# Altium PCB Mikrolysreklamen.PcbDoc
Units mm, origin at the board's own origin, x right, y up, seen from the top; angles counter-clockwise.
Board outline 108.61 x 31.33 mm, 2 copper layers (Top Layer, Bottom Layer); 25 components, 182 nets, 128 pads, 9 vias.
Unrouted connection lines stored in the file: 55.
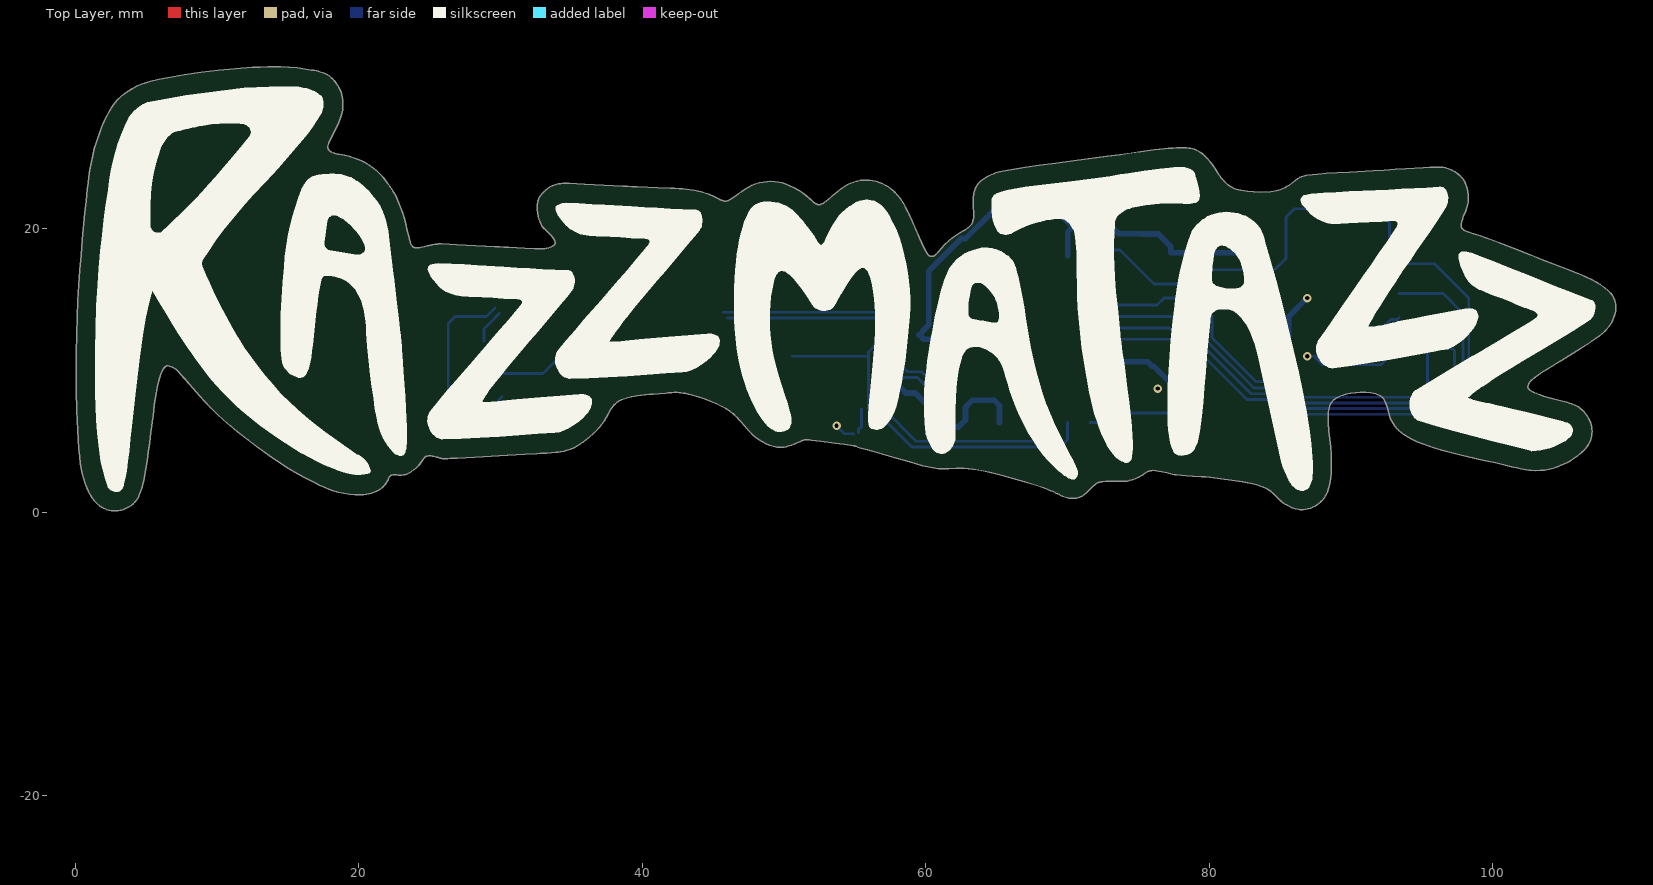
[diagram p0: Top Layer view]
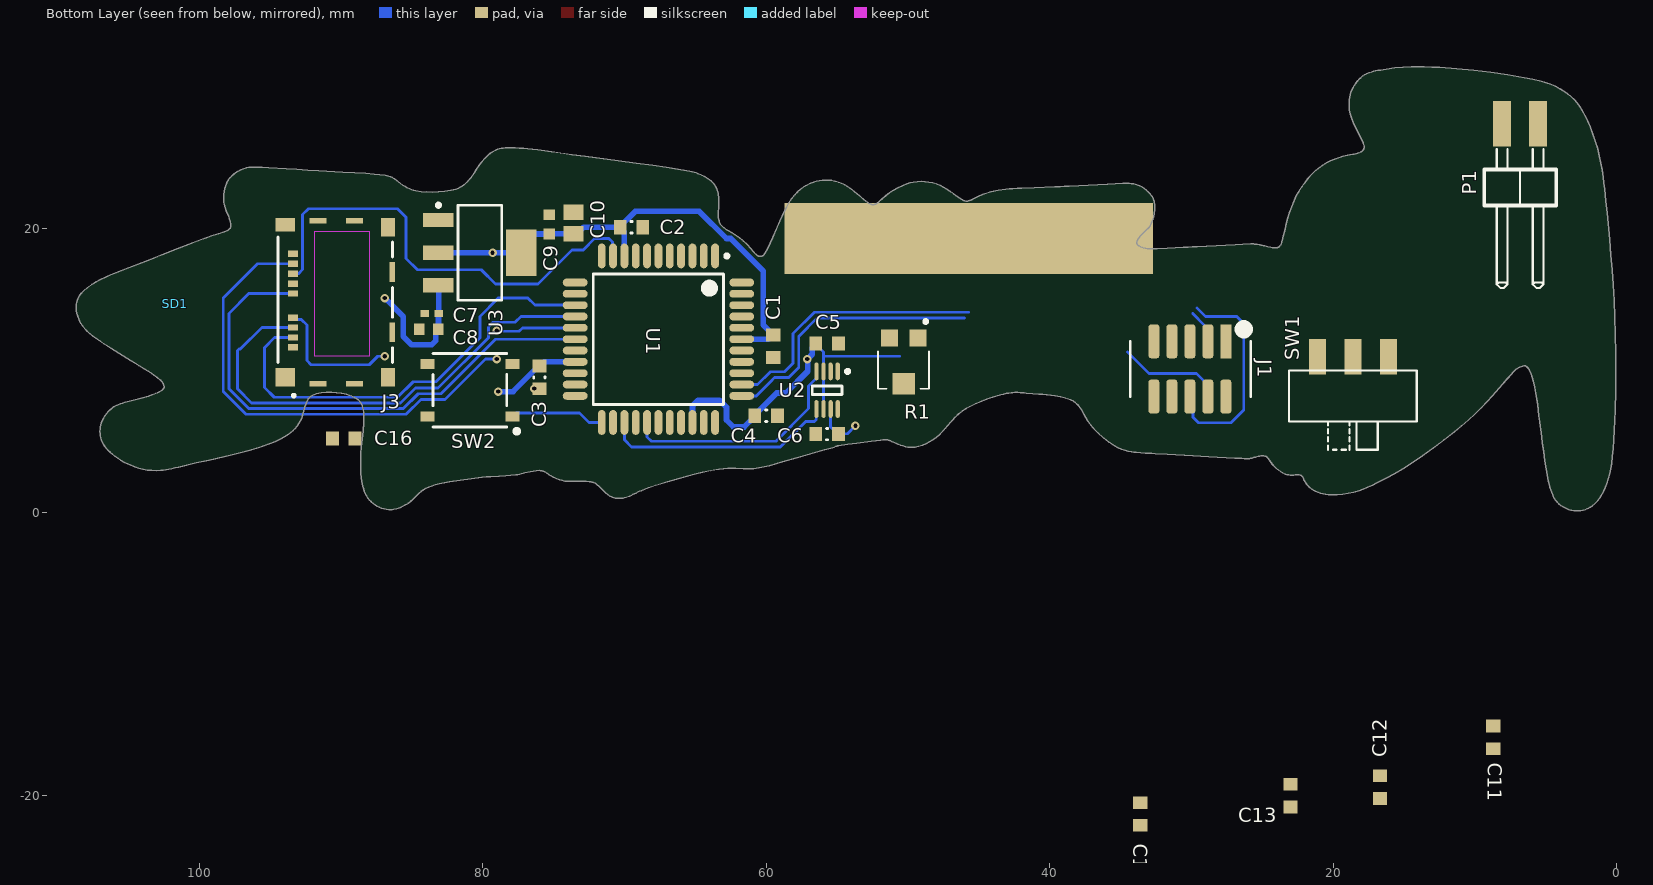
[diagram p1: Bottom Layer view, seen from below]

## Layer stack, top to bottom
Top Solder: solder mask 0.0102, Solder Resist, Dk 3.5
Top Layer: signal copper 0.0356
Dielectric 1: dielectric 0.32, FR-4, Dk 4.8
Bottom Layer: signal copper 0.0356
Bottom Solder: solder mask 0.0102, Solder Resist, Dk 3.5

## Board outline
464 vertices, not listed, extent 0.059,0.087 108.672,31.419

## Design rules (kind name [scope] priority, off if disabled: settings)
Clearance [All] p1: gap=0.2 ignorepadtopadclearanceinfootprint=FALSE except(0: Arc-Hole Track-Hole SMDPad-Hole THPad-Hole Via-Hole Fill-Hole Poly-Hole Region-Hole Text-Hole)
PolygonConnect [All] p1: connectstyle=Relief reliefconductorwidth=0.254 reliefentries=4 polygonreliefangle="90 Angle" airgapwidth=0.254
RoutingVias [All] p1: holewidth=0.3 width=0.6 viastyle="Through Hole" minholewidth=0.3 minwidth=0.6 maxholewidth=0.6 maxwidth=1.2
SolderMaskExpansion SolderMaskExpansion_via [IsVia] p1: expansion=0.102 istentingtop=TRUE
SolderMaskExpansion [All] p2: expansion=0.102 istentingtop=FALSE
Width [All] p1: maxlimit=4 minlimit=0.15 preferedwidth=0.2
30 further rules are at their usual default settings.

## Classes and differential pairs
component class Mikrolysreklamen: C1 C2 C3 C4 C5 C6 C7 C8 C9 C10 J1 J3 M1 M2 M3 P1 R1 SD1 SW1 SW2 U1 U2 U3

## Components (designator, comment, footprint, x,y, rotation, side; value= is the part's Value field where it differs from the comment)
C1 "100nF" CAPC0603(1608)55_N 59.5,11.7 r90 bottom
C2 "100nF" CAPC0603(1608)55_N 69.5,20.1 r0 bottom
C3 "100nF" CAPC0603(1608)55_N 76,9.5 r90 bottom
C4 "100nF" CAPC0603(1608)55_N 60,6.8 r0 bottom
C5 "100nF" CAPC0603(1608)55_N 55.7,11.9 r0 bottom
C6 "100nF" CAPC0603(1608)55_N 55.7,5.5 r180 bottom
C7 "100nF" CAPC1005X04L 83.6,14 r180 bottom
C8 "10µF" CAPC1608X06L 83.8,12.9 r180 bottom
C9 "10µF" CAPC1608X06L 75.3,20.3 r270 bottom
C10 "100µF" CAPC2012X11L 73.6,20.4 r270 bottom
C11 "100nF" CAPC0603(1608)55_N 8.7,-15.9 r90 bottom
C12 "100nF" CAPC0603(1608)55_N 16.7,-19.4 r270 bottom
C13 "100nF" CAPC0603(1608)55_N 23,-20 r90 bottom
C14 "100nF" CAPC0603(1608)55_N 33.6,-21.3 r270 bottom
C16 "100nF" CAPC0603(1608)55_N 89.8,5.2 r0 bottom
J1 "Header SMD 127 2x5" SMDHDRV10P127_2X5_615X330X560B 30.1,10.1 r270 bottom
J3 "MEM2085-00-115-00-A_REV0.2" GCT_MEM2085-00-115-00-A_REV0.2 90.4,14.8 r270 bottom
P1 "Pin List 1x2, Angled" LIST_ANG_1x2-SMD-2.54MM 6.8,27.4 r180 bottom
R1 "TC33X-2-103E" TRIM_TC33X-2-103E 50.3,10.5 r270 bottom
SD1 "Micro SD kort" microsdcard 101.7,14.7 r270 bottom
SW1 "Switch" JS102011SAQN 18.6,8.2 r180 bottom
SW2 "PTS526 spst-no Pushbutton" PTS526_SK15_SMTR2_LFS 80.9,8.6 r0 bottom
U1 "AVR ATXMEGA64A4U-AU" TQFP80P1200X1200X120-44N 67.6,12.2 r270 bottom
U2 "TXS0102DCUR" TSSOP50P310X90-8N 55.7,8.6 r270 bottom
U3 "TLV1117" SOT230P700X180-4N 80.2,18.3 r180 bottom

## Footprints (in the part's own frame and the unit in brackets; to place one, negate y for a bottom-side part, rotate by r counter-clockwise, add the part's x,y. Pads: shape width x height; smd on the part's side, far side on the other; paste and mask are expansions set on the pad)
CAPC0603(1608)55_N [mm] "Chip Capacitor, Body 1.6x0.8mm, Height 0.55mm, IPC Medium Density"
  rect 0.9x1 smd: 1(-0.8,0) 2(0.8,0)
  body extent -0.87,-0.48 0.88,0.47, height 0.55
CAPC1005X04L [mm] "Chip Capacitor, 2-Leads, Body 1.0x0.5mm, IPC High Density"
  rect 0.6x0.5 smd: 1(-0.5,0) 2(0.5,0)
  body extent -0.51,-0.25 0.51,0.25, height 0.5
CAPC1608X06L [mm] "Chip Capacitor, 2-Leads, Body 1.6x0.8mm, IPC High Density"
  rect 0.75x0.8 smd: 1(-0.675,0) 2(0.675,0)
  body extent -0.8,-0.43 0.8,0.43, height 0.8
CAPC2012X11L [mm] "Chip Capacitor, 2-Leads, Body 2.0x1.3mm, IPC High Density"
  rect 1.1x1.4 smd: 1(-0.75,0) 2(0.75,0)
  body extent -1,-0.62 1,0.63, height 0.77
GCT_MEM2085-00-115-00-A_REV0.2 [mm]
  rect 0.45x0.7 smd: CD(-2.02,-2.99) P1(3.18,-2.99) P2(2.48,-2.99) P3(1.78,-2.99) P4(1.08,-2.99) P5(-0.62,-2.99) P6(-1.32,-2.99) P7(-2.72,-2.99) P8(-3.42,-2.99)
  rect 0.95x1.4 smd: G1(-5.475,-3.53)
  rect 1.3x1.4 smd: G2(5.3,-3.53)
  rect 0.4x1.2 smd: G3(5.75,-1.23) G4(5.75,1.37) G9(-5.75,1.37) G10(-5.75,-1.23)
  rect 1.3x1 smd: G5(5.3,3.73) G8(-5.3,3.73)
  rect 1.4x0.4 smd: G6(2.11,4.03) G7(-2.14,4.03)
  Top Layer keep-out region: 3.8,-1.44 -5,-1.44 -5,2.41 3.8,2.41
  silkscreen extent -4.6,-4.03 6.68,4.03, body extent -5.82,-4.06 5.82,4.1, height 1.14
JS102011SAQN [mm] "Slide Switches - SPDT, SMD, ON-ON"
  rect 1.2x2.5 smd: 1(-2.5,2.75) 2(0,2.75) 3(2.5,2.75)
  silkscreen extent -4.5,-3.8 4.5,1.8, body extent -4.52,-3.8 4.52,3.75, height 3.5
LIST_ANG_1x2-SMD-2.54MM [mm] "Pin List, 2.54mm, Surface Mount, Angled"
  rect 1.27x3.18 smd: 1(-1.27,0) 2(1.27,0)
  silkscreen extent -2.54,-11.58 2.54,-1.8, body extent -2.56,-11.61 2.52,1.35, height 3.03
microsdcard [mm]
  body extent -5.51,0 5.51,15, height 1
PTS526_SK15_SMTR2_LFS [mm]
  rect 1x0.7 smd: 1(-3,1.85) 2(3,1.85) 3(-3,-1.85) 4(3,-1.85)
  silkscreen extent -3.45,-2.6 2.6,3.05, body extent -3.2,-2.6 3.2,2.6, height 1.5
SMDHDRV10P127_2X5_615X330X560B [mm] "SMD 2X5 Vertical Header"
  rect 2.4x0.76 smd: 1(-1.95,2.54)
  rrect50% 2.4x0.76 smd: 2(1.95,2.54) 3(-1.95,1.27) 4(1.95,1.27) 5(-1.95,0) 6(1.95,0) 7(-1.95,-1.27) 8(1.95,-1.27) 9(-1.95,-2.54) 10(1.95,-2.54)
  silkscreen extent -2.94,-4.21 1.95,4.29
SOT230P700X180-4N [mm] "SOT223, 4-Leads, Body 6,50x7,00mm (avg), Pitch 2,30mm, IPC Medium Density"
  rect 2.15x1 smd: 1(-2.925,2.3) 2(-2.925,0) 3(-2.925,-2.3)
  rect 2.15x3.25 smd: 4(2.925,0)
  silkscreen extent -3.05,-3.35 1.55,3.47, body extent -3.54,-3.25 3.54,3.25, height 1.65
TQFP80P1200X1200X120-44N [mm] "TQFP, 44-Leads, Body 10,00x10,00mm, Pitch 0,80mm, IPC Medium Density"
  oval 1.75x0.55 smd: 1(-5.875,4) 2(-5.875,3.2) 3(-5.875,2.4) 4(-5.875,1.6) 5(-5.875,0.8) 6(-5.875,0) 7(-5.875,-0.8) 8(-5.875,-1.6) 9(-5.875,-2.4) 10(-5.875,-3.2) 11(-5.875,-4) 23(5.875,-4) 24(5.875,-3.2) 25(5.875,-2.4) 26(5.875,-1.6) 27(5.875,-0.8) 28(5.875,0) 29(5.875,0.8) 30(5.875,1.6) 31(5.875,2.4) 32(5.875,3.2) 33(5.875,4)
  oval 0.55x1.75 smd: 12(-4,-5.875) 13(-3.2,-5.875) 14(-2.4,-5.875) 15(-1.6,-5.875) 16(-0.8,-5.875) 17(0,-5.875) 18(0.8,-5.875) 19(1.6,-5.875) 20(2.4,-5.875) 21(3.2,-5.875) 22(4,-5.875) 34(4,5.875) 35(3.2,5.875) 36(2.4,5.875) 37(1.6,5.875) 38(0.8,5.875) 39(0,5.875) 40(-0.8,5.875) 41(-1.6,5.875) 42(-2.4,5.875) 43(-3.2,5.875) 44(-4,5.875)
  silkscreen extent -6,-4.6 4.6,4.95, body extent -6.03,-5.97 5.97,6.03, height 1.1
TRIM_TC33X-2-103E [mm]
  rect 1.2x1.2 smd: 1(-1.8,1) 3(-1.8,-1)
  rect 1.5x1.6 smd: 2(1.45,0)
  silkscreen extent -3.07,-1.8 1.8,1.8, body extent -1.91,-1.8 2.05,1.8, height 1.13
TSSOP50P310X90-8N [mm] "TSSOP, 8-Leads, Body 2,1x2,4mm (max), Pitch 0,50mm, IPC Medium Density"
  oval 1.25x0.3 smd: 1(-1.325,0.75) 2(-1.325,0.25) 3(-1.325,-0.25) 4(-1.325,-0.75) 5(1.325,-0.75) 6(1.325,-0.25) 7(1.325,0.25) 8(1.325,0.75)
  silkscreen extent -1.45,-1.05 0.3,1.57, body extent -1.55,-1.05 1.55,1.05, height 0.8

## Part data
C1 C2 C3 C4 C5 C6 C11 C12 C13 C14 C16: library part 5152, antall=985, beskrivelse="X7R 50V 5%", dybde=0, elektrisk_verdi=100nF, hylle=0, id=5152, komponenttype=2, lager_type=Baklager, leverandor=Farnell, leverandor_varenr=1759122, navn=100nF, nokkelord="Kondensator, Capacitor, CAP", pakke_opprettet="18/02/2015 14:18:13", pakke_opprettet_av=815, pakketype=0603, pris=1, produsent=Multicomp, rad=21, rom=OV, symbol_opprettet="14/11/2014 20:19:34", symbol_opprettet_av=815
C7: library part C0402-100n, "Capacitor, X7R, ±10%", Artikkelnr Noca=20039200, Artikkelnr Simpro=N.A., Footprint Doc=0402, LatestRevisionDate=2009-11-23, Note=16V, Part Number=C0402-100n, Pin Count=2, Published=2009-05-08, Publisher="Nordic Semiconductor"
C8 C9: library part C0603-10µ, "Capacitor, X5R, ±20%", Artikkelnr Noca=20039234, Artikkelnr Simpro=N.A., Footprint Doc=0603, LatestRevisionDate=2011-01-17, Note=6.3V, Part Number=C0603-10µ, Pin Count=2, Published=2011-01-17, Publisher="Nordic Semiconductor"
C10: library part C0805-TBD, "Chip Cap 0805", Artikkelnr Noca=N.A., Artikkelnr Simpro=N.A., Footprint Doc=0805, LatestRevisionDate=2013-12-17, Note="Chip Cap", Part Number=C0805-TBD, Pin Count=2, Published=2013-12-17, Publisher="Nordic Semiconductor"
J1: library part 2449, "1,27mm Pitch SMD Header", id=2449, navn="Header SMD 127 2x5", nokkelord=JTAG, pakke_opprettet="15.11.2014 18:30:38", pakke_opprettet_av=815, pakketype=101, pris=20, symbol_opprettet="15.11.2014 18:33:29", symbol_opprettet_av=815
J3: library part 6893, "MicroSD Push pull Memory Card Connector", Package=None, Availability="Not in stock", beskrivelse="MICRO SD PUSH-PULL SMT 1.15MM", Check_prices=https://www.snapeda.com/parts/MEM2085-00-115-00-A/Global+Connector+Technology/view-part/?ref=eda, id=6893, komponenttype=11, leverandor=DigiKey, leverandor_varenr=2073-MEM2085-00-115-00-ACT-ND, MF="Global Connector Technology", MP=MEM2085-00-115-00-A, navn="MEM2085 microSDcardHolder", nokkelord="sdcard, microsd", pakke_opprettet="16/04/2023 02:33:45", pakke_opprettet_av=815, pakketype=SMD, Price=None, pris=12, produsent=GCT, produsent_varenr=MEM2085-00-115-00-A, SnapEDA_Link=https://www.snapeda.com/parts/MEM2085-00-115-00-A/Global+Connector+Technology/view-part/?ref=snap, symbol_opprettet="16/04/2023 02:35:20", symbol_opprettet_av=815
P1: library part "Pin List Ang 1x2 SMD, 2.54mm", "Pin List 1x2, 2.54mm (100mil), Right Angled, SMD", Manufacturer=W-CON, Manufacturer Part Number=1125B-1102S0Z135R2, Part number IPS=N.A., Artikkelnr Noca=55010023, ComponentLink1Description=Datasheet, ComponentLink2Description="Supplier link", Footprint Doc=LIST_ANG_1x2-SMD-2.54MM, HelpURL=\\hizz\pro\app9717\Datasheet\connectores\W-CON\1125B-11XXXXZXXXXX.pdf, LatestRevisionDate=2016-05-26, Part Number="Pin List Ang 1x2 SMD, 2.54mm", Pin Count=2, Published=2016-01-22, Publisher="Nordic Semiconductor", Supplier 1=Cabcon, Supplier 2=Samtec, Supplier Part Number 1=1125B-1102S0Z135R2, Supplier Part Number 2=TSM-102-01-L-SH-A
R1: library part 6892, beskrivelse="SMD Trimpot", elektrisk_verdi=10k, id=6892, komponenttype=1, leverandor=DigiKey, leverandor_varenr=TC33X-103ECT-ND, navn=TC33X-2-103E, nokkelord="potentiometer, potmeter, trim, resistor", pakke_opprettet="16/04/2023 02:23:24", pakke_opprettet_av=815, pakketype=SMD, pris=4, produsent=Bourns, produsent_varenr=TC33X-2-103E, symbol_opprettet="03/11/2016 15:34:07", symbol_opprettet_av=815
SD1: library part 3019, antall=-1, dybde=1, hylle=3, id=3019, lager_type=Baklager, navn="Micro SD kort", nokkelord="SD, minnekort", pakke_opprettet="16/04/2023 02:41:18", pakke_opprettet_av=815, pris=70, rad=3, rom=OV, symbol_opprettet="16/04/2023 02:41:09", symbol_opprettet_av=815
SW1: library part JS102011SAQN, "SMD slide Switch (ON-ON)", Manufacturer="C&K Components", Part number IPS=N.A., Supplier Part Number 1=401-1999-1-ND, Artikkelnr Noca=50019064, ComponentLink1Description=Datasheet, ComponentLink2Description="Supplier link", Footprint Doc=JS102011SAQN, HelpURL=http://www.ck-components.com/14398/js_14july11.pdf/, LatestRevisionDate=2011-08-15, Manufacturer Part Number=JS102011SAQN, Part Number=JS102011SAQN, Pin Count=3, Published=2011-08-15, Publisher="Nordic Semiconductor", Supplier 1=Digi-Key, Supplier 2=Mouser, Supplier Part Number 2=611-JS102011SAQN
SW2: library part 6894, beskrivelse="Tactile SMD pushbutton 5.2x5.2mm 1.5mmh, 260gf, spst-no", id=6894, komponenttype=12, leverandor=DigiKey, leverandor_varenr=CKN12221-1-ND, navn="PTS526 spst-no Pushbutton", nokkelord="knapp, button, tactile, spst-no", pakke_opprettet="16/04/2023 03:26:55", pakke_opprettet_av=815, pakketype=SMD, pris=2, produsent=C&K, produsent_varenr="PTS526 SK15 SMTR2 LFS", symbol_opprettet="14/11/2014 21:57:30", symbol_opprettet_av=815
U1: library part 2103, "Mikrokontroller", antall=75, dybde=0, hylle=0, id=2103, kolonne=2, lager_type=Fremlager, navn="AVR ATXMEGA64A4U-AU", pakke_opprettet="22.08.2014 14:00:28", pakke_opprettet_av=774, pakketype=45, pris=0, produsent=Atmel, rad=4, rom=OV, symbol_opprettet="22.08.2014 14:00:55", symbol_opprettet_av=774
U2: "IC VOLT-LEVEL TRANSLATOR 8-US8", Manufacturer="Texas Instruments", Part number IPS=N.A., Supplier Part Number 1=296-21931-1-ND, Artikkelnr Noca=N.A., ComponentLink1Description=Datasheet, ComponentLink2Description="Supplier link", Footprint Doc=8-VFSOP, HelpURL=http://www.ti.com/lit/ds/symlink/txs0102.pdf, LatestRevisionDate=2012-09-06, Manufacturer Part Number=TXS0102DCUR, Note="TEXAS INSTRUMENTS - TXS0102DCUR - IC, TRANSLATOR", Part Number=TXS0102DCUR, Pin Count=8, Published=2012-09-06, Publisher="Nordic Semiconductor", Supplier 1=Digi-Key, Supplier 2=Farnell, Supplier Part Number 2=170-3315
U3: library part TLV1117-33CDCYR, "REG LDO 3.3V 0.8A SOT223", Manufacturer="Texas Instruments", Part number IPS=N.A., Supplier Part Number 1=296-21112-1-ND, Artikkelnr Noca=N.A., ComponentLink1Description=Datasheet, ComponentLink1URL=http://www.ti.com/lit/ds/symlink/tlv1117.pdf, ComponentLink2Description="Supplier link", Footprint Doc=SOT-223, LatestRevisionDate=2018-08-10, Manufacturer Part Number=TLV1117-33CDCYR, Part Number=TLV1117-33CDCYR, Pin Count=4, Published=2018-08-10, Publisher="Nordic Semiconductor", Supplier 1=Digi-Key

## Free pads (board coordinates)
  rect 26x5 smd far side: 0(45.7,19.3)

## Via types
v1: diameter 0.6, hole 0.3, Top Layer to Bottom Layer, tented both sides, 9 vias

## Nets (pads, with @x,y where several pads share a name; then routed paths per layer and width w, separated by ;. In a path a pad name is that pad's centre, name@x,y a point inside that pad or via, vN(x,y) a via of type N, cw(c..) or ccw(c..) an arc to the next point about the centre after c; other vN are vias at no path point)
BRIGTHNESS: R1.2 U1.1
CARD_DETECT: J3.CD U1.10 | length 33
  Bottom Layer w0.2: U1.10 70.844,18.119 70.844,19.044 71.1,19.3 72.1,19.3 72.9,18.5 73.7,18.5 76.1,16.1 79.1,16.1 80.1,17.1 84.6,17.1 85.4,17.9 85.4,20.8 86,21.4 92.3,21.4 92.7,21 92.7,17.105 92.985,16.82 J3.CD
CKI: U2.1
DUMMY_NET: SW1.3
GND: C1.1 C2.1 C3.1 C4.1 C5.1 C6.1 C7.1 C8.1 C9.1 C10.1 C11.1 C12.1 C13.1 C14.1 C16.1 J1.2 J1.10 J3.G1 J3.G2 J3.G3 J3.G4 J3.G5 J3.G6 J3.G7 J3.G8 J3.G9 J3.G10 J3.P6 P1.2 R1.1 SW2.3 SW2.4 U1.8 U1.18 U1.30 U1.38 U2.2 U3.1
  other v1: 76.354,8.714
MISO: J3.P7 U1.16 | length 39.7
  Bottom Layer w0.2: U1.16 77.2,13 77.44,12.76 78.96,12.76 v1(79,12.8) ; v1(79,10.8) 79.8,10.8 82.65,7.95 84.35,7.95 85.4,6.9 96.7,6.9 98.3,8.5 98.3,15.1 95.88,17.52 J3.P7
MOSI: J3.P3 U1.15 | length 34.5
  Bottom Layer w0.2: U1.15 77.3,13.8 77.7,13.4 79.249,13.4 79.6,13.049 79.6,12.3 83.15,8.75 84.75,8.75 85.8,7.7 96.3,7.7 97.3,8.7 97.3,11.383 97.183,11.5 97.1,11.5 95.58,13.02 J3.P3
NetD1_2: 
NetD1_3: 
NetD2_2: 
NetD2_3: 
NetD3_2: 
NetD3_3: 
NetD4_2: 
NetD4_3: 
NetD5_2: 
NetD5_3: 
NetD6_2: 
NetD6_3: 
NetD7_2: 
NetD7_3: 
NetD8_2: 
NetD8_3: 
NetD9_2: 
NetD9_3: 
NetD10_2: 
NetD10_3: 
NetD11_2: 
NetD11_3: 
NetD12_2: 
NetD12_3: 
NetD13_2: 
NetD13_3: 
NetD14_2: 
NetD14_3: 
NetD15_2: 
NetD15_3: 
NetD16_2: 
NetD16_3: 
NetD17_2: 
NetD17_3: 
NetD18_2: 
NetD18_3: 
NetD19_2: 
NetD19_3: 
NetD20_2: 
NetD20_3: 
NetD21_2: 
NetD21_3: 
NetD22_2: 
NetD22_3: 
NetD23_2: 
NetD23_3: 
NetD24_2: 
NetD24_3: 
NetD25_2: 
NetD25_3: 
NetD26_2: 
NetD26_3: 
NetD27_2: 
NetD27_3: 
NetD28_2: 
NetD28_3: 
NetD29_2: 
NetD29_3: 
NetD30_2: 
NetD30_3: 
NetD31_2: 
NetD31_3: 
NetD32_2: 
NetD32_3: 
NetD33_2: 
NetD33_3: 
NetD34_2: 
NetD34_3: 
NetD35_2: 
NetD35_3: 
NetD36_2: 
NetD36_3: 
NetD37_2: 
NetD37_3: 
NetD38_2: 
NetD38_3: 
NetD39_2: 
NetD39_3: 
NetD40_2: 
NetD40_3: 
NetD41_2: 
NetD41_3: 
NetD42_2: 
NetD42_3: 
NetD43_2: 
NetD43_3: 
NetD44_2: 
NetD44_3: 
NetD45_2: 
NetD45_3: 
NetD46_2: 
NetD46_3: 
NetD47_2: 
NetD47_3: 
NetD48_2: 
NetD48_3: 
NetD49_2: 
NetD49_3: 
NetD50_2: 
NetD50_3: 
NetD51_2: 
NetD51_3: 
NetD52_2: 
NetD52_3: 
NetD53_2: 
NetD53_3: 
NetD54_2: 
NetD54_3: 
NetD55_2: 
NetD55_3: 
NetD56_2: 
NetD56_3: 
NetD57_2: 
NetD57_3: 
NetD58_2: 
NetD58_3: 
NetD59_2: 
NetD59_3: 
NetD60_2: 
NetD60_3: 
NetD61_2: 
NetD61_3: 
NetD62_2: 
NetD62_3: 
NetD63_2: 
NetD63_3: 
NetD64_2: 
NetD64_3: 
NetD65_2: 
NetD65_3: 
NetD66_2: 
NetD66_3: 
NetD67_2: 
NetD67_3: 
NetD68_2: 
NetD68_3: 
NetD69_2: 
NetD69_3: 
NetD70_2: 
NetD70_3: 
NetD71_2: 
NetD71_3: 
NetD72_2: 
NetD72_3: 
NetD73_2: 
NetD73_3: 
NetD74_2: 
NetD74_3: 
NetD75_2: 
NetD75_3: 
NetD76_2: 
NetD76_3: 
NetD77_2: 
NetD77_3: 
NetD78_2: 
NetD78_3: 
NetD79_2: 
NetD79_3: 
NetD80_2: 
NetD80_3: 
NetD81_2: 
NetD81_3: 
NetD82_2: 
NetD82_3: 
NetP1_1: P1.1 SW1.2
NetU1_25: U1.25 U2.5 | length 17
  Bottom Layer w0.2: U2.5@56.45,6.827 U2.5 56.469,7.256 56.469,6.531 56.6,6.4 57.2,6.4 59,4.6 69.5,4.6 70,5.1 U1.25
NetU1_27: U1.27 U2.4 | length 16.4
  Bottom Layer w0.2: U2.4 56.45,9.45 57,8.9 57,7.3 59.3,5 68.1,5 68.4,5.3 U1.27
PDI_CLOCK: J1.6 U1.35 | length 34.9
  Bottom Layer w0.2: 29.6,14.4 29,13.8 26.8,13.8 26.3,13.3 26.3,7.2 27.2,6.3 29.483,6.3 29.876,6.693 29.876,7.926 J1.6 ; 45.7,14.1 56.6,14.1 58.1,12.6 58.1,10.5 58.7,9.9 59.7,9.9 60.6,9 U1.35
PDI_DATA: J1.3 U1.34 | length 21.7
  Bottom Layer w0.2: J1.3 28.83,12.919 29.11,13.199 29.11,13.21 29.9,14 ; 46,13.7 56.4,13.7 57.7,12.4 57.7,10.2 58.4,9.5 59.4,9.5 59.7,9.2 60.7,8.2 U1.34
SCK: J3.P5 U1.17 | length 37.4
  Bottom Layer w0.2: U1.17 79.1,12.2 82.95,8.35 84.55,8.35 85.6,7.3 96.5,7.3 97.9,8.7 97.9,14.02 96.5,15.42 J3.P5
SDI: U2.8
SS: J3.P2 U1.14 | length 31.3
  Bottom Layer w0.2: U1.14 76.318,14.6 76.818,15.1 78.9,15.1 80.2,13.8 80.2,12.3 83.3,9.2 84.9,9.2 86,8.1 94.7,8.1 95.4,8.8 95.4,11.6 94.68,12.32 J3.P2
"USER BUTTON": SW2.1 SW2.2 U1.23 | length 6.7
  Bottom Layer w0.2: U1.23 72.493,6.325 73.168,7 77.65,7 SW2.1
VCC_P3V3: C1.2 C2.2 C3.2 C4.2 C5.2 C9.2 C10.2 J1.4 J3.P4 R1.3 U1.9 U1.19 U1.31 U1.39 U2.3 U2.6 U3.2 U3.4 | length 83.5
  Bottom Layer w0.2: J1.4 28.83,8.97 29.648,9.788 32.988,9.788 34.5,11.3 ; 50.6,11 55.95,11 ; U2.6 U2.3 55.95,11 ; C5.2@56.5,11.85 55.95,11.3 55.95,11 ; v1(86.9,11) 87.4,11 88,10.4 92.1,10.4 92.4,10.7 92.4,13.2 92.795,13.595 93.265,13.595 J3.P4
  Bottom Layer w0.4: C5.2@56.5,11.85 56.75,11.6 56.75,11.134 57.084,10.8 v1(57.1,10.8) ; v1@57.062,10.762 57.062,9.938 58.6,8.4 59.25,8.4 60.8,6.85 C4.2 60.8,6.75 61.55,6 62.3,6 62.8,6.5 62.8,7.4 63.3,7.9 64.8,7.9 65.2,7.5 U1.31 ; C1.2 C1.2@59.55,12.5 ; U1.39 59.85,12.2 C1.2@59.55,12.5 ; U1.9 70,19.75 70.35,20.1 72.866,20.1 72.966,20 73.25,20 73.613,19.638 75.288,19.638 C9.2 76.4,19.625 77.275,18.75 U3.4 v1(79.3,18.3) U3.2 ; C2.2 70.3,20.15 69.225,21.225 64.725,21.225 62.8,19.3 62.5,19.3 60.2,17 60.2,13.2 59.8,12.8 59.8,12.75 C1.2@59.55,12.5 ; U1.19 75.65,10.6 75.95,10.3 C3.2 76.05,10.3 77.85,8.5 v1(78.9,8.5)
VDD: C6.2 C7.2 C8.2 C11.2 C12.2 C13.2 C14.2 C16.2 SW1.1 U2.7 U3.3 | length 13.2
  Bottom Layer w0.2: v1(53.7,6.1) 54.267,5.533 54.867,5.533 C6.2 ; C6.2@55.25,5.6 55.25,5.9 55.333,5.9 55.45,6.017 U2.7
  Bottom Layer w0.4: U3.3 83.1,15.975 C7.2 83.113,13.988 83.113,12.913 C8.2 83.3,12.725 83.3,12.1 83.6,11.8 85,11.8 85.6,12.4 85.6,13.8 v1(86.9,15.1)
pads on no net: J1.1 J1.5 J1.7 J1.8 J1.9 J3.P1 J3.P8 U1.2 U1.3 U1.4 U1.5 U1.6 U1.7 U1.11 U1.12 U1.13 U1.20 U1.21 U1.22 U1.24 U1.26 U1.28 U1.29 U1.32 U1.33 U1.36 U1.37 U1.40 U1.41 U1.42 U1.43 U1.44

## Polygon pours and split planes (outlines as drawn)
no net on Top Overlay "NONET_L-01_P-001" (solid): 94.475,6.724 ccw(c95.149,7.274) 94.623,6.581 ccw(c95.001,7.078) 94.788,6.491 ccw(c114.403,68.486) 97.316,5.747 98.652,5.388 99.989,5.042 101.292,4.711 101.869,4.565 102.153,4.493 102.434,4.421 102.711,4.35 102.733,4.345 102.755,4.345 ccw(c102.661,8.863) 104.882,4.928 ccw(c103.789,6.901) 105.383,5.305 ccw(c104.858,5.863) 105.61,5.716 ccw(c105.162,5.776) 105.444,6.128 ccw(c104.879,5.466) 105.244,6.257 ccw(c104.548,4.76) 104.94,6.363 102.304,7.029 101.475,7.23 100.644,7.43 100.287,7.518 ccw(c97.593,-3.984) 100.018,7.578 99.883,7.606 99.75,7.632 99.617,7.659 cw(c102.371,22.184) 99.014,7.786 cw(c100.344,13.36) 98.725,7.863 cw(c99.857,11.705) 98.446,7.957 cw(c99.549,10.885) 98.176,8.073 cw(c99.864,6.521) 98.487,8.354 cw(c104.107,1.243) 98.81,8.598 cw(c109.719,-6.52) 99.282,8.928 cw(c118.573,-19.596) 99.93,9.355 cw(c141.158,-54.91) 101.295,10.211 102.041,10.666 102.809,11.129 103.583,11.594 105,12.449 105.648,12.845 106.236,13.212 106.751,13.542 ccw(c106.224,14.29) 107.036,13.867 ccw(c106.009,14.459) 107.192,14.537 ccw(c106.629,14.486) 107.126,14.755 ccw(c106.753,14.548) 106.892,14.952 cw(c132.503,84.826) 105.266,15.569 104.423,15.903 103.572,16.246 102.724,16.591 100.993,17.291 100.132,17.632 99.287,17.959 98.467,18.265 ccw(c97.964,16.857) 98.166,18.339 ccw(c98.023,17.317) 97.987,18.348 ccw(c98.003,17.781) 97.821,18.318 ccw(c97.919,18.026) 97.692,18.234 ccw(c97.932,18.041) 97.623,18.047 ccw(c98.302,18.011) 97.628,17.925 ccw(c98.918,18.086) 97.653,17.784 ccw(c100.133,18.371) 97.696,17.626 ccw(c103.539,19.262) 97.903,17.014 ccw(c100.574,18.12) 98.053,16.705 ccw(c100.307,17.978) 98.533,16.093 ccw(c99.961,17.677) 99.081,15.735 ccw(c102.16,22.086) 99.488,15.553 ccw(c107.292,34.543) 100.005,15.349 100.648,15.106 cw(c93.736,-2.847) 101.341,14.824 101.686,14.678 ccw(c108.528,30.984) 102.033,14.536 ccw(c105.716,23.863) 102.384,14.405 cw(c99.613,5.983) 102.868,14.23 cw(c102.329,12.901) 103.05,14.141 cw(c102.808,13.711) 103.175,14.041 cw(c103.022,13.904) 103.226,13.925 cw(c102.907,13.938) 103.096,13.681 cw(c102.346,14.516) 102.967,13.581 cw(c101.692,15.488) 102.838,13.5 ccw(c105.976,7.993) 102.741,13.445 101.086,12.434 100.262,11.943 99.444,11.46 98.635,10.986 97.034,10.045 96.223,9.563 95.409,9.071 94.594,8.571 94.576,8.558 ccw(c95.289,7.689) 94.165,7.668 ccw(c95.691,7.651) 94.189,7.386 ccw(c95.601,7.604)
no net on Top Overlay "NONET_L-01_P-001" (solid): 87.693,11.003 ccw(c89.098,11.624) 87.83,10.757 ccw(c89.018,11.532) 88.366,10.273 ccw(c88.745,11.043) 88.56,10.204 ccw(c88.69,10.791) 88.747,10.193 ccw(c80.873,73.929) 91.355,10.569 92.719,10.8 94.078,11.041 95.4,11.281 95.987,11.387 96.276,11.439 96.561,11.49 96.841,11.541 96.863,11.545 96.881,11.554 ccw(c94.926,15.604) 98.57,12.969 ccw(c96.749,14.309) 98.868,13.52 ccw(c98.159,13.809) 98.903,13.987 ccw(c98.455,13.849) 98.574,14.303 ccw(c98.34,13.477) 98.338,14.335 ccw(c98.337,12.691) 98.018,14.304 95.344,13.811 94.507,13.649 93.669,13.484 93.307,13.414 ccw(c95.289,3.224) 92.903,13.327 92.772,13.296 92.642,13.264 cw(c89.094,27.533) 92.04,13.128 cw(c90.934,18.687) 91.746,13.077 cw(c91.176,17.011) 91.452,13.046 cw(c91.236,16.164) 91.157,13.039 cw(c93.26,12.372) 91.322,13.427 cw(c99.236,9.384) 91.514,13.783 cw(c107.593,4.644) 91.807,14.279 cw(c121.264,-3.681) 92.219,14.938 cw(c151.168,-22.79) 93.103,16.286 93.593,17.01 94.098,17.751 94.607,18.494 95.54,19.862 95.964,20.492 96.347,21.069 96.678,21.583 ccw(c95.884,22.046) 96.802,21.999 ccw(c95.614,22.108) 96.665,22.672 ccw(c96.169,22.383) 96.515,22.841 ccw(c96.263,22.506) 96.22,22.923 cw(c90.599,95.133) 94.484,22.809 93.578,22.762 92.662,22.718 91.747,22.676 89.882,22.592 88.959,22.544 88.055,22.489 87.182,22.425 ccw(c87.281,21.085) 86.712,22.302 ccw(c86.961,21.792) 86.573,22.207 ccw(c86.781,21.983) 86.49,22.077 ccw(c86.775,21.998) 86.505,21.878 ccw(c87.121,22.127) 86.561,21.769 ccw(c87.704,22.495) 86.644,21.653 ccw(c88.971,23.495) 86.75,21.526 ccw(c91.369,25.444) 87.195,21.056 ccw(c89.152,23.167) 87.46,20.838 ccw(c88.988,22.956) 88.152,20.482 ccw(c88.791,22.558) 88.798,20.385 ccw(c88.962,27.548) 89.244,20.389 ccw(c88.473,40.786) 89.8,20.418 90.487,20.464 cw(c91.584,3.599) 91.234,20.496 91.608,20.506 ccw(c91.105,37.658) 91.982,20.521 ccw(c91.496,30.021) 92.355,20.548 cw(c93.348,11.512) 92.866,20.589 cw(c92.931,19.121) 93.07,20.584 cw(c93.028,20.08) 93.224,20.546 cw(c93.145,20.356) 93.32,20.464 cw(c93.032,20.343) 93.304,20.189 cw(c92.268,20.641) 93.227,20.043 cw(c91.289,21.242) 93.143,19.916 93.078,19.825 cw(c8.769,75.499) 91.994,18.217 91.449,17.429 90.906,16.65 90.368,15.881 89.305,14.359 88.769,13.583 88.234,12.798 87.702,12.004 87.693,11.986 ccw(c88.713,11.494)
no net on Top Overlay "NONET_L-01_P-001" (solid): 77.569,4.211 ccw(c78.042,4.618) 77.66,4.124 ccw(c77.945,4.487) 77.867,4.032 ccw(c78.042,5.223) 78.599,4.156 ccw(c78.177,4.875) 78.792,4.313 ccw(c77.849,5.205) 78.941,4.502 ccw(c77.568,5.386) 79.085,4.783 ccw(c77.098,5.571) 79.198,5.169 ccw(c59.214,8.803) 79.423,6.766 79.52,7.741 79.613,8.797 79.705,9.906 79.824,11.374 79.888,12.098 79.955,12.804 80.026,13.48 ccw(c79.642,13.541) 80.03,13.512 80.031,13.529 80.033,13.548 cw(c80.669,13.489) 80.035,13.568 cw(c82,13.446) 80.061,13.788 cw(c80.922,13.626) 80.091,13.904 cw(c80.681,13.707) 80.141,14.014 cw(c80.577,13.765) 80.216,14.114 cw(c80.833,13.405) 80.747,14.341 cw(c80.984,12.605) 81.859,14.123 cw(c81.006,12.696) 82.324,13.71 cw(c79.367,11.413) 82.375,13.643 cw(c76.718,9.787) 83.437,11.1 85.124,3.548 ccw(c90.344,4.902) 85.651,2.246 ccw(c87.37,3.232) 86.052,1.753 ccw(c86.593,2.344) 86.561,1.543 86.565,1.543 ccw(c86.564,2.067) 86.997,1.772 ccw(c85.629,2.618) 87.235,2.533 ccw(c81.805,3.127) 87.268,3.131 ccw(c76.613,3.147) 87.243,3.878 ccw(c68.37,2.6) 87.16,4.777 ccw(c54.048,0.971) 86.91,6.536 ccw(c33.785,-2.331) 86.73,7.556 86.513,8.667 86.261,9.867 ccw(c-49.559,-19.999) 84.236,17.921 ccw(c28.13,1.988) 83.882,19.12 cw(c84.168,19.21) 83.876,19.14 83.873,19.153 83.869,19.169 ccw(c83.016,18.944) 83.864,19.186 ccw(c81.333,18.667) 83.728,19.636 ccw(c81.768,18.835) 83.512,20.037 ccw(c81.399,18.493) 82.032,21.032 ccw(c81.196,18.007) 80.93,21.134 ccw(c81.213,18.273) 79.898,20.83 ccw(c80.553,19.527) 79.839,20.798 79.82,20.787 79.801,20.777 ccw(c81.595,17.975) 78.801,19.781 ccw(c97.231,12.762) 77.567,14.265 ccw(c128.857,7.205) 77.086,6.713 ccw(c84.007,6.572) 77.413,4.464 ccw(c78.352,4.867)
no net on Top Overlay "NONET_L-01_P-001" (solid): 70.667,18.283 ccw(c61.706,18.015) 70.565,19.391 ccw(c69.03,19.345) 69.847,20.645 ccw(c69.474,19.842) 69.652,20.709 ccw(c69.421,19.553) 69.431,20.732 ccw(c69.412,18.486) 69.17,20.719 ccw(c70.315,11.073) 68.468,20.609 ccw(c69.716,13.722) 67.444,20.343 ccw(c70.014,12.943) 66.675,20.029 66.1,19.756 cw(c65.627,20.449) 65.291,19.68 cw(c65.726,20.381) 65.006,19.977 cw(c66.581,20.885) 64.827,20.408 cw(c68.224,21.359) 64.729,20.881 cw(c70.901,21.713) 64.674,21.597 cw(c70.21,21.794) 64.671,21.735 cw(c67.792,21.769) 64.672,21.848 cw(c66.505,21.803) 64.676,21.94 cw(c65.698,21.868) 64.696,22.081 cw(c65.267,21.886) 65.043,22.447 cw(c66.482,19.418) 65.841,22.709 cw(c68.864,8.516) 67.026,22.911 70.297,23.297 ccw(c59.248,112.122) 73.012,23.677 73.721,23.791 74.317,23.883 cw(c86.731,-57.748) 76.519,24.188 cw(c80.058,-3.876) 77.211,24.266 cw(c78.004,16.61) 77.786,24.304 cw(c77.879,21.477) 78.248,24.281 cw(c78.182,23.387) 78.859,23.976 cw(c78.432,23.65) 78.907,23.901 cw(c78.166,23.511) 78.948,23.808 cw(c77.354,23.202) 78.988,23.693 cw(c71.489,21.489) 79.074,23.372 79.171,22.992 cw(c73.511,21.596) 79.241,22.668 cw(c77.131,22.266) 79.275,22.398 cw(c78.634,22.323) 79.193,22.002 cw(c78.869,22.212) 78.994,21.846 cw(c78.671,22.87) 78.664,21.796 cw(c78.532,30.196) 78.16,21.804 ccw(c77.403,3.576) 76.457,21.795 ccw(c76.689,17.071) 76.231,21.778 ccw(c76.924,14.679) 75.98,21.749 ccw(c77.823,7.932) 75.686,21.707 74.902,21.579 ccw(c75.621,17.552) 74.539,21.497 ccw(c75.554,17.716) 74.198,21.389 ccw(c74.716,19.793) 73.566,21.015 ccw(c74.553,20.148) 73.413,20.801 ccw(c74.301,20.282) 73.381,20.742 ccw(c74.343,20.297) 73.323,20.584 ccw(c74.685,20.208) 73.276,20.305 ccw(c95.61,18.879) 73.23,18.971 ccw(c110.344,18.849) 73.299,16.582 ccw(c106.496,18.497) 73.377,15.529 73.431,14.993 73.488,14.428 73.668,12.537 ccw(c77.259,12.855) 73.682,12.403 73.708,12.201 73.744,11.943 73.835,11.29 73.945,10.513 74.066,9.631 74.191,8.686 cw(c2.605,-0.576) 74.412,6.773 cw(c42.844,3.462) 74.529,5.356 cw(c63.096,4.639) 74.55,4.455 cw(c71.307,4.48) 74.506,3.945 cw(c74.034,3.968) 74.342,3.609 cw(c74.133,3.846) 74.13,3.53 cw(c74.128,3.893) 74.016,3.548 cw(c74.629,5.188) 73.239,4.122 cw(c77.074,7.221) 72.622,5.102 cw(c83.615,10.297) 71.804,7.412 cw(c115.446,17.467) 70.822,13.661 cw(c100.603,16.336) 70.724,15.198 cw(c159.424,17.548) 70.696,16.879 ccw(c24.628,16.636)
no net on Top Overlay "NONET_L-01_P-001" (solid): 60.917,4.19 ccw(c61.108,4.784) 61.096,4.16 ccw(c61.103,4.872) 61.546,4.315 ccw(c60.896,5.159) 61.738,4.506 ccw(c60.552,5.428) 61.9,4.765 ccw(c60.059,5.673) 62.026,5.086 ccw(c61.824,5.14) 62.033,5.148 ccw(c57.924,5.286) 62.035,5.236 62.037,5.393 62.039,5.641 62.043,6.025 62.044,6.412 62.044,6.443 cw(c85.419,6.795) 62.126,8.785 cw(c78.073,7.385) 62.193,9.413 cw(c70.572,8.516) 62.48,10.867 cw(c64.504,10.245) 62.635,11.239 cw(c63.443,10.81) 62.791,11.453 cw(c63.275,10.96) 62.947,11.567 cw(c63.495,10.455) 63.82,11.652 cw(c63.286,9.275) 64.212,11.528 cw(c63.135,8.867) 64.626,11.321 cw(c63.65,9.781) 65.32,10.511 cw(c60.514,8.313) 65.554,9.904 cw(c27.182,-2.435) 65.803,9.1 ccw(c101.934,20.027) 66.137,8.051 ccw(c79.781,12.904) 68.318,4.054 ccw(c72.107,7.027) 68.531,3.802 ccw(c75.42,9.964) 69.154,3.169 ccw(c76.258,10.844) 69.614,2.768 ccw(c71.968,5.511) 70,2.479 ccw(c70.675,3.537) 70.181,2.383 ccw(c70.396,2.871) 70.345,2.34 ccw(c70.369,2.585) 70.482,2.367 ccw(c70.306,2.651) 70.611,2.515 ccw(c70.026,2.805) 70.647,2.601 ccw(c69.968,2.827) 70.666,2.669 ccw(c70.424,2.729) 70.671,2.702 ccw(c70.09,2.811) 70.623,3.067 ccw(c50.8,-6.139) 70.348,3.637 70.204,3.922 70.056,4.211 69.905,4.504 cw(c130.924,36.088) 69.29,5.721 cw(c94.826,18.221) 68.99,6.353 cw(c88.463,15.296) 68.703,7.007 cw(c85.148,13.904) 68.433,7.69 cw(c90.97,15.841) 67.418,11.408 cw(c112.227,20.174) 67.205,12.573 67.023,13.687 ccw(c-5.474,2.434) 66.774,15.184 ccw(c39.078,10.225) 66.636,15.903 ccw(c47.976,12.06) 66.479,16.6 ccw(c52.853,13.258) 66.296,17.274 ccw(c64.899,16.849) 65.965,17.847 ccw(c63.977,15.94) 65.048,18.478 ccw(c64.49,17.133) 64.917,18.525 ccw(c64.212,16.116) 63.4,18.491 ccw(c64.65,14.644) 63.198,18.419 ccw(c64.23,15.79) 62.605,18.101 ccw(c64.553,15.286) 61.991,17.556 ccw(c64.06,15.688) 61.533,16.865 ccw(c65.957,14.793) 61.33,16.36 ccw(c71.217,12.998) 61.124,15.677 ccw(c84.957,9.314) 60.898,14.762 ccw(c99.251,5.93) 60.48,12.697 60.431,12.413 ccw(c153.01,-3.423) 60.144,10.633 ccw(c85.681,6.856) 60.045,9.893 ccw(c77.888,7.78) 59.933,8.443 ccw(c80.175,7.688) 60.03,5.57 60.039,5.469 60.065,5.456 ccw(c62.623,6.034) 60.481,4.521 ccw(c61.358,5.183) 60.706,4.298 ccw(c61.149,4.904)
no net on Top Overlay "NONET_L-01_P-001" (solid): 48.525,6.518 ccw(c51.414,8.673) 48.916,6.074 ccw(c50.14,7.329) 49.291,5.795 ccw(c49.66,6.443) 49.635,5.698 ccw(c49.656,6.976) 49.992,5.743 ccw(c49.78,6.484) 50.133,5.799 ccw(c49.862,6.329) 50.344,5.98 ccw(c49.56,6.461) 50.464,6.635 ccw(c47.107,6.231) 50.377,7.089 ccw(c41.184,4.716) 50.22,7.629 50.014,8.258 cw(c72.556,16.247) 49.246,10.899 cw(c62.768,13.861) 48.991,12.515 cw(c60.533,13.663) 49.225,16.247 cw(c51.546,15.693) 49.328,16.573 cw(c50.671,16.039) 49.426,16.773 cw(c50.109,16.376) 49.56,16.944 cw(c49.849,16.648) 49.732,17.045 cw(c49.827,16.401) 50.261,16.885 cw(c48.597,14.56) 50.704,16.493 cw(c45.372,11.54) 51.286,15.781 cw(c38.194,6.332) 52.023,14.665 ccw(c52.8,15.139) 52.816,14.229 ccw(c52.806,15.116) 53.588,14.696 53.605,14.731 cw(c77.021,2.068) 54.422,16.137 cw(c60.686,12.201) 54.859,16.759 cw(c56.658,15.399) 55.271,17.178 cw(c55.558,16.861) 55.628,17.283 cw(c55.438,16.773) 55.923,17.02 cw(c54.629,16.248) 56.022,16.822 cw(c53.726,15.867) 56.093,16.628 cw(c51.657,15.203) 56.139,16.476 cw(c45.529,13.838) 56.46,13.604 cw(c28.996,13.578) 56.413,11.973 cw(c7.946,14.775) 56.291,10.347 56.143,8.831 ccw(c95.09,4.45) 55.975,6.905 ccw(c60.162,6.657) 55.977,6.371 ccw(c56.845,6.408) 56.051,6.057 ccw(c56.302,6.174) 56.205,5.914 ccw(c56.515,6.674) 56.967,5.989 ccw(c54.585,8.485) 58,7.991 ccw(c40.066,12.556) 58.348,9.687 ccw(c17.395,16.233) 58.617,11.677 ccw(c-30.902,21.662) 58.831,13.837 ccw(c43.775,14.655) 58.129,19.274 ccw(c50.123,16.538) 57.232,21.125 ccw(c55.467,20.036) 56.494,21.838 ccw(c55.815,20.558) 55.156,21.848 ccw(c56.7,18.604) 53.93,20.891 ccw(c57.848,17.588) 53.494,20.291 ccw(c59.353,16.65) 53.155,19.678 ccw(c62.236,15.24) 52.896,19.102 cw(c52.134,19.398) 52.795,18.918 cw(c52.447,19.177) 52.739,18.856 cw(c52.562,19.049) 52.681,18.816 cw(c52.606,18.963) 52.623,18.798 cw(c52.624,19.003) 52.5,18.84 cw(c52.754,19.205) 52.436,18.894 cw(c52.94,19.39) 52.372,18.969 cw(c53.199,19.584) 52.31,19.063 ccw(c44.462,14.512) 51.432,20.319 ccw(c41.3,11.934) 51.104,20.699 ccw(c35.796,7.011) 50.754,21.081 ccw(c48.888,19.296) 48.534,21.854 ccw(c48.8,20.32) 48.027,21.671 ccw(c48.65,20.684) 47.694,21.355 ccw(c49.83,19.759) 47.472,21.002 ccw(c51.475,18.885) 47.234,20.475 ccw(c54.241,17.84) 47,19.737 ccw(c60.455,16.348) 46.645,17.688 ccw(c69.812,15.275) 46.549,16.459 ccw(c78.007,14.849) 46.509,15.098 ccw(c87.864,14.764) 46.524,13.608 ccw(c62.93,13.95) 47.122,9.549 ccw(c58.407,12.738) 47.758,7.826 ccw(c54.394,10.835)
no net on Top Overlay "NONET_L-01_P-001" (solid): 34.049,10.1 ccw(c35.3,10.735) 34.532,9.562 ccw(c34.986,10.287) 34.718,9.474 ccw(c34.909,10.053) 34.904,9.444 ccw(c33.705,75.969) 37.54,9.543 38.92,9.628 40.297,9.723 41.637,9.823 42.233,9.866 42.525,9.888 42.813,9.909 43.096,9.928 43.118,9.928 43.14,9.933 ccw(c41.625,14.163) 44.97,11.162 ccw(c43.297,12.69) 45.325,11.68 ccw(c44.651,12.042) 45.409,12.14 ccw(c44.948,12.045) 45.115,12.485 ccw(c44.794,11.689) 44.885,12.542 ccw(c44.708,10.915) 44.563,12.546 41.852,12.339 41.003,12.267 40.152,12.193 39.787,12.162 ccw(c41.202,-2.888) 39.108,12.083 cw(c36.877,28.685) 38.496,12.012 cw(c37.97,17.755) 38.197,11.993 cw(c38.042,15.91) 37.902,11.992 cw(c38.01,14.988) 37.61,12.017 cw(c39.838,11.007) 37.816,12.384 cw(c45.274,7.54) 38.044,12.718 cw(c52.509,2.377) 38.386,13.181 cw(c63.943,-6.351) 38.866,13.793 cw(c97.593,-33.305) 39.886,15.038 40.449,15.707 41.029,16.39 41.615,17.076 42.687,18.337 43.176,18.918 43.619,19.452 44.004,19.926 ccw(c43.258,20.471) 44.17,20.326 ccw(c43.013,20.561) 44.105,21.01 ccw(c43.572,20.773) 43.973,21.197 ccw(c43.684,20.887) 43.691,21.31 cw(c46.092,101.226) 41.953,21.381 41.047,21.43 40.13,21.484 39.214,21.539 37.351,21.652 36.426,21.701 35.522,21.743 34.649,21.773 ccw(c34.623,20.226) 34.34,21.747 ccw(c34.526,20.728) 34.168,21.7 ccw(c34.357,21.176) 34.02,21.62 ccw(c34.198,21.383) 33.926,21.5 ccw(c34.212,21.393) 33.921,21.3 ccw(c34.584,21.485) 33.964,21.185 ccw(c35.163,21.761) 34.033,21.059 ccw(c36.273,22.445) 34.124,20.922 ccw(c39.096,24.302) 34.517,20.407 ccw(c36.708,22.319) 34.757,20.162 ccw(c36.527,22.131) 35.407,19.733 ccw(c36.259,21.691) 36.039,19.567 ccw(c36.942,26.513) 36.483,19.523 ccw(c37.824,39.448) 37.038,19.494 37.724,19.468 cw(c37.022,2.498) 38.47,19.421 38.844,19.391 ccw(c40.159,36.529) 39.218,19.367 ccw(c39.741,28.909) 39.593,19.354 cw(c39.642,10.84) 40.106,19.341 cw(c40.014,17.896) 40.306,19.314 cw(c40.212,18.824) 40.455,19.26 cw(c40.356,19.083) 40.54,19.169 cw(c40.237,19.079) 40.495,18.896 cw(c39.533,19.442) 40.404,18.76 cw(c38.694,20.09) 40.306,18.643 40.232,18.56 cw(c-42.775,87.055) 38.986,17.078 38.36,16.351 37.738,15.633 37.121,14.925 35.902,13.524 35.287,12.809 34.671,12.085 34.058,11.352 34.045,11.334 ccw(c35.011,10.736) 33.939,10.36 ccw(c35.387,10.82)
no net on Top Overlay "NONET_L-01_P-001" (solid): 25.043,5.835 ccw(c26.293,6.47) 25.525,5.296 ccw(c25.979,6.022) 25.712,5.209 ccw(c25.903,5.787) 25.897,5.178 ccw(c24.699,71.704) 28.533,5.278 29.913,5.362 31.29,5.458 32.631,5.557 33.226,5.601 33.519,5.622 33.806,5.643 34.089,5.663 34.111,5.663 34.133,5.667 ccw(c32.619,9.898) 35.963,6.897 ccw(c34.291,8.424) 36.318,7.414 ccw(c35.644,7.776) 36.402,7.875 ccw(c35.941,7.779) 36.109,8.219 ccw(c35.787,7.423) 35.878,8.277 ccw(c35.701,6.649) 35.556,8.28 32.845,8.073 31.996,8.001 31.146,7.928 30.78,7.897 ccw(c32.195,-7.154) 30.101,7.818 cw(c27.87,24.419) 29.489,7.747 cw(c28.963,13.49) 29.19,7.727 cw(c29.036,11.644) 28.895,7.727 cw(c29.003,10.723) 28.603,7.751 cw(c30.831,6.741) 28.809,8.118 cw(c36.27,3.273) 29.037,8.453 cw(c43.504,-1.89) 29.38,8.916 cw(c54.934,-10.615) 29.859,9.527 cw(c88.594,-37.577) 30.879,10.772 31.442,11.441 32.023,12.125 32.609,12.81 33.68,14.072 34.169,14.653 34.612,15.186 34.997,15.661 ccw(c34.251,16.206) 35.163,16.06 ccw(c34.006,16.296) 35.098,16.745 ccw(c34.565,16.507) 34.966,16.931 ccw(c34.678,16.621) 34.684,17.045 cw(c37.085,96.965) 32.946,17.116 32.04,17.165 31.123,17.218 30.207,17.274 28.344,17.386 27.42,17.436 26.515,17.477 25.642,17.507 ccw(c25.616,15.96) 25.334,17.482 ccw(c25.52,16.462) 25.161,17.434 ccw(c25.35,16.91) 25.013,17.354 ccw(c25.192,17.118) 24.919,17.234 ccw(c25.205,17.127) 24.914,17.035 ccw(c25.577,17.22) 24.958,16.92 ccw(c26.157,17.496) 25.027,16.794 ccw(c27.266,18.18) 25.118,16.657 ccw(c30.089,20.036) 25.51,16.142 ccw(c27.702,18.054) 25.751,15.897 ccw(c27.52,17.866) 26.4,15.467 ccw(c27.252,17.426) 27.032,15.301 ccw(c27.935,22.245) 27.476,15.258 ccw(c28.816,35.165) 28.031,15.228 28.718,15.203 cw(c28.015,-1.773) 29.463,15.155 29.837,15.126 ccw(c31.152,32.263) 30.211,15.101 ccw(c30.734,24.642) 30.586,15.088 cw(c30.635,6.574) 31.099,15.076 cw(c31.007,13.63) 31.299,15.049 cw(c31.205,14.559) 31.448,14.995 cw(c31.349,14.817) 31.533,14.903 cw(c31.23,14.813) 31.488,14.631 cw(c30.526,15.177) 31.397,14.494 cw(c29.687,15.826) 31.299,14.378 31.225,14.295 cw(c-51.781,82.79) 29.979,12.812 29.354,12.085 28.731,11.368 28.114,10.66 26.895,9.259 26.28,8.544 25.664,7.819 25.051,7.086 25.038,7.068 ccw(c26.004,6.471) 24.933,6.094 ccw(c26.38,6.555)
no net on Top Overlay "NONET_L-01_P-001" (solid): 15.097,9.853 ccw(c16.019,10.962) 15.205,9.772 ccw(c16.219,11.227) 15.48,9.615 ccw(c16.018,10.794) 15.657,9.549 ccw(c15.853,10.159) 15.748,9.527 ccw(c15.817,9.953) 15.852,9.523 ccw(c15.818,9.928) 15.908,9.532 ccw(c15.849,9.875) 15.999,9.561 ccw(c15.775,10.034) 16.058,9.593 ccw(c15.321,10.476) 16.456,10.291 ccw(c10.581,11.847) 16.588,10.925 ccw(c-1.829,13.828) 16.7,11.76 16.811,12.806 cw(c93.973,5.209) 16.964,14.221 cw(c50.857,10.188) 17.059,14.95 cw(c40.692,11.623) 17.172,15.675 cw(c34.171,12.75) 17.309,16.384 cw(c17.719,16.306) 17.715,16.723 cw(c17.696,14.119) 18.325,16.646 cw(c17.418,12.933) 18.772,16.507 cw(c18.001,14.477) 19.862,15.597 cw(c16.816,13.697) 20.222,14.831 cw(c14.663,12.97) 20.457,13.86 cw(c11.016,12.394) 20.566,12.687 ccw(c61.274,14.907) 20.844,9.664 ccw(c90.408,18.14) 21.065,8.013 ccw(c58.679,13.427) 21.284,6.662 ccw(c26.801,7.537) 21.46,5.901 ccw(c26.657,7.88) 22.271,4.462 ccw(c23.767,5.646) 22.608,4.13 ccw(c22.971,4.572) 22.932,4.002 ccw(c22.935,4.295) 22.993,4.007 ccw(c22.936,4.275) 23.033,4.019 ccw(c22.9,4.346) 23.249,4.29 ccw(c21.475,4.784) 23.31,4.627 ccw(c17.146,5.208) 23.337,5.161 ccw(c5.44,5.359) 23.329,5.936 ccw(c-30.879,4.168) 23.265,7.332 23.217,8.138 23.161,9.009 23.099,9.937 23.06,10.558 22.99,11.501 22.969,11.752 22.95,11.968 ccw(c-14.795,8.646) 22.857,12.887 22.772,13.632 22.642,14.732 22.452,16.309 22.407,16.67 22.401,16.732 22.398,16.762 ccw(c20.714,16.619) 22.394,16.798 22.078,19.452 ccw(c10.922,18.003) 21.94,20.274 ccw(c17.419,19.34) 21.759,20.915 ccw(c18.003,19.518) 21.491,21.491 ccw(c17.428,19.235) 21.046,22.152 ccw(c15.886,18.286) 20.427,22.863 ccw(c17.599,19.955) 19.874,23.313 ccw(c18.098,20.698) 19.164,23.674 ccw(c18.254,21.112) 18.301,23.831 ccw(c18.156,16.178) 17.558,23.809 ccw(c17.9,19.704) 17.256,23.772 ccw(c17.698,20.977) 16.995,23.718 ccw(c17.506,21.723) 16.767,23.646 ccw(c17.172,22.636) 16.342,23.339 ccw(c17.539,22.306) 16.201,23.148 ccw(c18.332,21.807) 16.095,22.962 16.014,22.804 ccw(c31.981,16.255) 14.756,17.32 ccw(c60.407,12.581) 14.518,11.741 ccw(c19.951,11.627) 14.63,10.523 ccw(c16.717,11.425) 14.812,10.185 ccw(c15.735,10.784) 14.824,10.166 ccw(c16.366,11.231) 15.052,9.896 ccw(c15.903,10.772)
no net on Top Overlay "NONET_L-01_P-001" (solid): 2.508,1.596 cw(c2.991,2.201) 2.27,1.917 cw(c13.079,5.686) 1.676,4.689 cw(c43.012,9.154) 1.443,8.356 cw(c100.155,10.234) 1.596,16.044 cw(c86.386,10.131) 1.914,19.557 cw(c68.281,12.315) 2.337,22.728 cw(c16.976,21.302) 3.795,27.827 cw(c6.508,25.863) 4.781,28.733 cw(c5.973,26.797) 5.073,28.885 cw(c19.47,-45.01) 11.911,29.894 cw(c14.235,1.614) 13.662,29.983 cw(c14.132,10.407) 15.188,29.96 cw(c15.478,26.977) 17.336,29.33 cw(c16.461,28.866) 17.443,28.996 cw(c16.216,28.828) 17.454,28.8 cw(c15.645,28.858) 17.38,28.343 cw(c16.835,28.506) 17.371,28.317 cw(c16.777,28.529) 17.327,28.219 cw(c4.331,35.737) 15.974,26.258 cw(c-47.999,80.42) 12.506,22.409 ccw(c34.009,2.096) 8.959,17.829 ccw(c9.4,17.549) 8.889,17.441 ccw(c9.191,17.502) 8.895,17.416 ccw(c9.248,17.519) 8.903,17.392 ccw(c9.385,17.569) 8.911,17.37 8.928,17.331 ccw(c34.98,27.679) 9.699,15.569 ccw(c42.493,30.839) 11.028,12.992 ccw(c31.708,24.628) 15.044,7.734 ccw(c31.11,24.435) 16.768,6.232 ccw(c40.059,35.811) 18.389,5.025 19.723,4.084 cw(c19.143,2.491) 20.79,2.891 cw(c20.713,2.917) 20.787,2.883 cw(c20.68,2.932) 20.783,2.875 cw(c20.62,2.965) 20.779,2.867 cw(c20.358,3.129) 20.768,2.852 cw(c20.654,2.944) 20.763,2.845 cw(c20.496,3.091) 20.632,2.755 cw(c19.974,4.858) 19.494,2.707 cw(c20.798,9.525) 18.138,3.113 cw(c24.843,19.199) 15.467,4.508 14.277,5.296 cw(c32.376,32.178) 13.078,6.143 cw(c24.637,21.91) 9.484,9.558 cw(c27.957,24.569) 8.834,10.395 cw(c35.179,29.939) 8.226,11.243 cw(c43.38,35.638) 7.679,12.05 cw(c66.439,50.75) 6.853,13.334 cw(c52.387,41.914) 5.5,15.613 ccw(c5.437,15.581) 5.377,15.617 5.22,14.989 5.069,14.367 ccw(c29.13,8.629) 4.929,13.746 ccw(c18.785,10.776) 4.716,12.471 4.517,10.943 4.197,8.275 3.953,6.068 ccw(c103.633,-6.33) 3.748,4.29 cw(c-33.292,8.096) 3.579,2.9 cw(c-1.653,3.558) 3.37,1.952 cw(c2.858,1.973) 2.526,1.582 cw(c2.708,1.851)

## Silkscreen, mask and mechanical layers (free items; w line width, h text height)
Top Overlay:
  drawing of 906 lines, arcs and shapes, not listed
Mechanical 1:
  drawing of 954 lines, arcs and shapes, not listed
Mechanical 4:
  drawing of 915 lines, arcs and shapes, not listed